# Altium PCB pcb.pcbdoc (part 3 of 3)
Units mm, origin at the board's own origin, x right, y up, seen from the top; angles counter-clockwise.
Board outline 95 x 60 mm, 4 copper layers (Top Layer, TopInt Layer, BotInt Layer, Bottom Layer), stack 1.456 mm thick; 194 components, 186 nets, 781 pads, 313 vias.
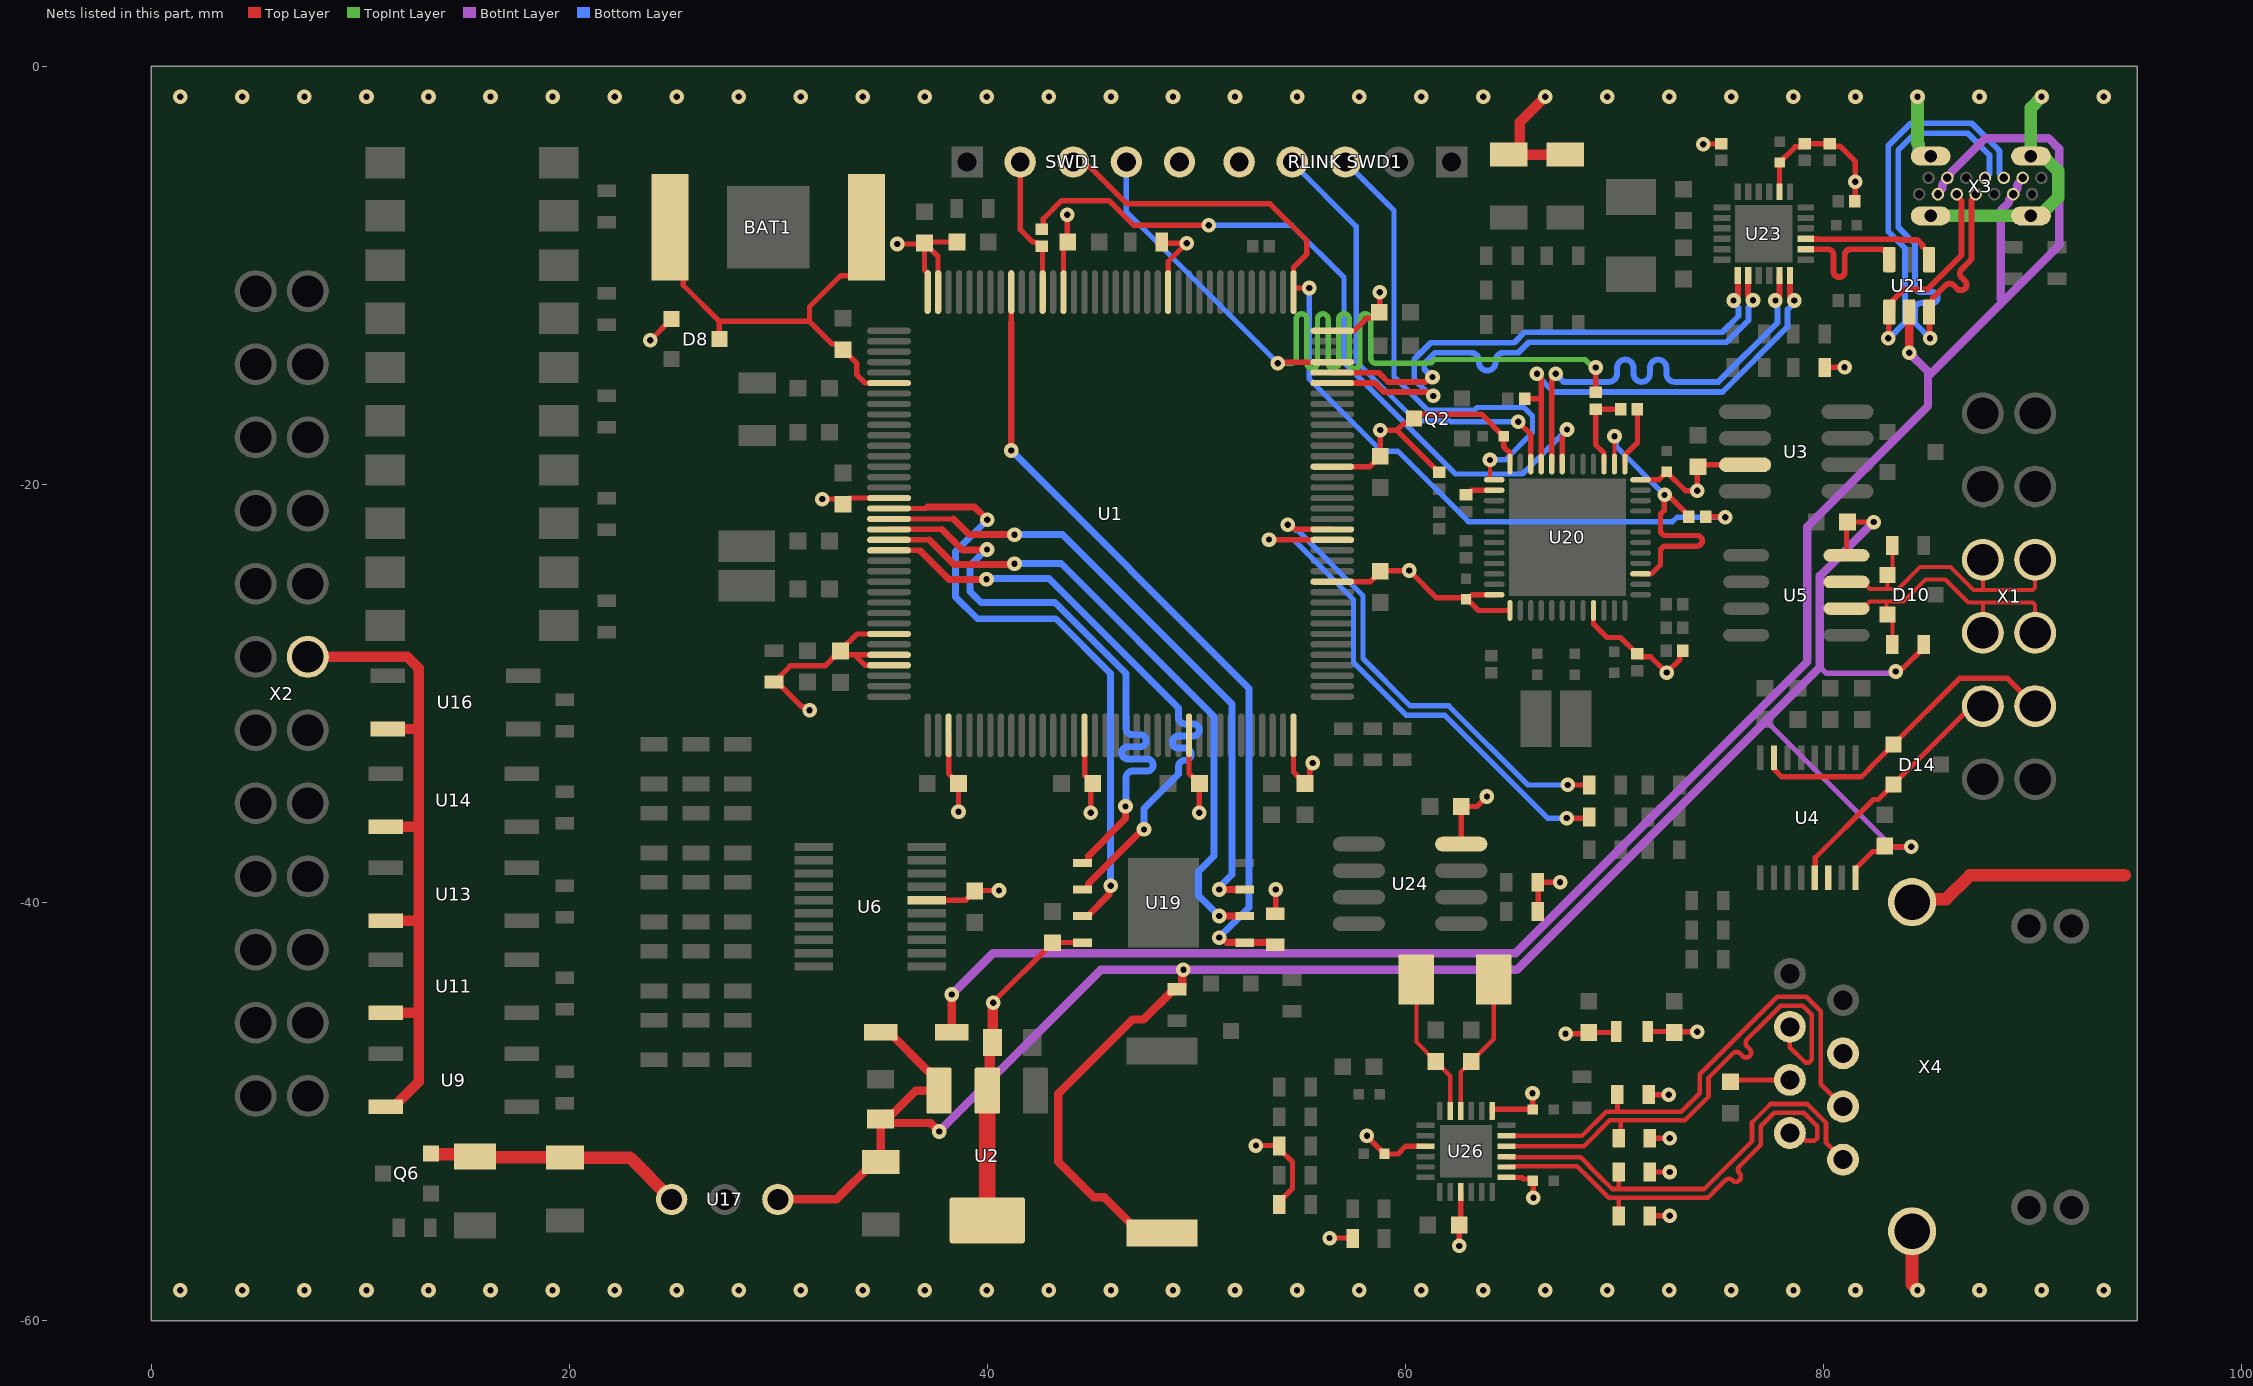
[diagram p5: the nets of this part, all layers, seen from the top]

## Via types
v1: diameter 0.7, hole 0.3, Top Layer to Bottom Layer, tented both sides, 313 vias

## Nets (pads, with @x,y where several pads share a name; then routed paths per layer and width w, separated by ;. In a path a pad name is that pad's centre, name@x,y a point inside that pad or via, vN(x,y) a via of type N, cw(c..) or ccw(c..) an arc to the next point about the centre after c; other vN are vias at no path point) (continued)
OUT_COM: U9.4 U11.4 U13.4 U14.4 U16.4 X2.18 | length 33.7
  Top Layer w0.5: X2.18@7.5,-28.25 12.26,-28.25 12.8,-28.79 12.8,-31.698 ; U9.4@11.225,-49.77 11.7,-49.77 11.8,-49.67 11.8,-49.565 12.8,-48.565 12.8,-45.2 ; U11.4@11.225,-45.27 12.73,-45.27 12.8,-45.2 ; U13.4@11.225,-40.87 12.73,-40.87 12.8,-40.8 ; U14.4@11.225,-36.37 12.77,-36.37 12.8,-36.4 ; U16.4@11.312,-31.698 12.8,-31.698 ; 12.8,-45.2 12.8,-40.8 ; 12.8,-40.8 12.8,-36.4 ; 12.8,-36.4 12.8,-31.698
QUADSPI_CLK: U1.22 U19.6 | length 30.6
  Top Layer w0.254: U1.22@35.3,-23.15 36.75,-23.15 36.784,-23.184
  Top Layer w0.325: 36.784,-23.184 36.809,-23.184 38.165,-24.54 39.96,-24.54 v1(39.963,-24.538) ; U19.6@44.549,-39.375 44.799,-39.375 44.837,-39.337 44.837,-39.087 47.424,-36.5 v1(47.5,-36.5)
  Bottom Layer w0.325: v1(39.963,-24.538) 40,-24.5 42.95,-24.5 49.141,-30.691 49.141,-30.967 49.141,-31.13 ccw(c49.466,-31.13) 49.466,-31.455 49.854,-31.455 cw(c49.854,-31.744) 50.144,-31.744 cw(c49.854,-31.744) 49.854,-32.034 49.141,-32.034 ccw(c49.141,-32.323) 48.852,-32.323 ccw(c49.141,-32.323) 49.141,-32.613 49.466,-32.613 cw(c49.466,-32.902) 49.756,-32.902 cw(c49.466,-32.902) 49.466,-33.192 ccw(c49.466,-33.517) 49.141,-33.517 49.141,-33.859 48.934,-34.066 47.5,-35.5 v1(47.5,-36.5)
QUADSPI_NCS: R31.2 U1.136 U19.1 | length 39
  Top Layer w0.254: 41.15,-12.3 U1.136@41.15,-10.8
  Top Layer w0.325: v1(41.15,-18.375) 41.15,-12.3 ; v1(51.094,-41.675) 51.215,-41.675 51.455,-41.915 U19.1@52.319,-41.915 53.662,-41.915 R31.2@53.774,-42.027
  Bottom Layer w0.325: v1(41.15,-18.375) 52.525,-29.75 52.525,-40.244 v1(51.094,-41.675)
QUADSPI_OI0: U1.20 U19.5 | length 30.3
  Top Layer w0.254: U1.20@35.3,-22.15 35.306,-22.144 37.819,-22.144 37.825,-22.15
  Top Layer w0.325: 37.825,-22.15 38.815,-23.14 39.96,-23.14 v1(39.988,-23.113) ; U19.5@44.799,-38.105 44.837,-38.067 44.837,-37.763 46.613,-35.987 v1(46.613,-35.4)
  Bottom Layer w0.325: v1(39.988,-23.113) 39.944,-23.113 39.175,-23.882 39.175,-25.118 39.698,-25.641 43.237,-25.641 46.633,-29.037 46.633,-30.368 46.633,-31.646 ccw(c46.958,-31.646) 46.958,-31.971 47.307,-31.971 cw(c47.307,-32.261) 47.596,-32.261 cw(c47.307,-32.261) 47.307,-32.55 46.714,-32.55 ccw(c46.714,-32.84) 46.425,-32.84 ccw(c46.714,-32.84) 46.714,-33.129 47.645,-33.129 cw(c47.645,-33.419) 47.934,-33.419 cw(c47.645,-33.419) 47.645,-33.708 46.958,-33.708 ccw(c46.958,-34.033) 46.633,-34.033 46.633,-34.775 46.633,-35.379 v1(46.613,-35.4)
QUADSPI_OI1: U1.21 U19.2 | length 30.6
  Top Layer w0.254: U1.21@35.3,-22.65 37.227,-22.652
  Top Layer w0.325: 37.227,-22.652 38.4,-23.825 41.263,-23.825 v1(41.3,-23.788) ; v1(51.094,-40.645) U19.2@52.319,-40.645
  Bottom Layer w0.325: v1(41.3,-23.788) 43.538,-23.788 50.85,-31.1 50.85,-37.775 50.109,-38.516 50.109,-39.66 v1(51.094,-40.645)
QUADSPI_OI2: U1.19 U19.3 | length 30.4
  Top Layer w0.254: U1.19@35.3,-21.65 38.375,-21.65
  Top Layer w0.325: 38.375,-21.65 39.125,-22.4 v1(41.3,-22.4) ; v1(51.094,-39.375) U19.3@52.319,-39.375
  Bottom Layer w0.325: v1(41.3,-22.4) 43.6,-22.4 51.7,-30.5 51.7,-38.668 51.094,-39.273 v1(51.094,-39.375)
QUADSPI_OI3: U1.18 U19.7 | length 30.6
  Top Layer w0.254: U1.18@35.3,-21.15 37.062,-21.15 37.137,-21.075
  Top Layer w0.325: 37.137,-21.075 39.387,-21.075 v1(40,-21.688) ; U19.7@44.549,-40.645 44.799,-40.645 44.837,-40.607 45.828,-39.616 45.828,-39.272 v1(45.9,-39.2)
  Bottom Layer w0.325: v1(40,-21.688) 38.475,-23.213 38.475,-25.375 39.525,-26.425 43.279,-26.425 45.9,-29.046 v1(45.9,-39.2)
RD_N: R49.1 U26.22 X4.6 | length 24.4
  Top Layer w0.22: U26.22@64.83,-51.65 68.544,-51.65 69.774,-50.42 70.3,-50.42 ; R49.1@70.198,-51.275 70.3,-51.172 70.3,-50.42 ; X4.6@78.395,-45.945 78.395,-46.915 79.131,-47.652 79.314,-47.652 79.443,-47.523 79.443,-45.369 79,-44.927 77.96,-44.927 77.088,-45.798 76.342,-46.545 ccw(c76.509,-46.713) 76.342,-46.88 76.469,-47.008 cw(c76.301,-47.175) 76.469,-47.343 cw(c76.301,-47.175) 76.134,-47.343 76.006,-47.216 ccw(c75.839,-47.383) 75.671,-47.216 75.258,-47.629 74.5,-48.386 74.5,-49.294 73.374,-50.42 70.3,-50.42
RD_P: R48.1 U26.23 X4.3 | length 24.4
  Top Layer w0.22: U26.23@64.83,-51.15 68.45,-51.15 69.6,-50 70.2,-50 ; R48.1@70.145,-49.187 70.145,-49.945 70.2,-50 ; X4.3@80.935,-49.755 79.863,-48.683 79.863,-45.195 79.174,-44.507 77.786,-44.507 74.08,-48.212 74.08,-49.12 73.2,-50 70.2,-50
RED_LED: R61.2 U1.89 | length 23.7
  Top Layer w0.254: v1(54.375,-21.925) 54.496,-21.925 54.721,-22.15 U1.89@56.5,-22.15 ; v1(67.77,-34.373) R61.2@68.895,-34.373
  Bottom Layer w0.254: v1(54.375,-21.925) 54.496,-21.925 54.754,-22.183 54.831,-22.183 57.973,-25.325 57.973,-28.33 60.235,-30.592 62.076,-30.592 65.857,-34.373 v1(67.77,-34.373)
RS485_N: D10.1 R5.1 U5.7 X1.3 X1.10 | length 15
  Top Layer w0.2: U5.7@81.1,-24.665 81.882,-24.665 82.217,-25 83.064,-25 ; R5.1@83.308,-22.95 83.308,-24.078 D10.1@83.064,-24.322 83.064,-25 ; X1.10@87.625,-23.6 87.625,-25.025 87.65,-25.05 ; X1.3@90.125,-23.6 90.125,-24.933 90.008,-25.05 87.65,-25.05 ; 83.064,-25 83.575,-25 84.625,-23.95 86.074,-23.95 87.174,-25.05 87.65,-25.05
RS485_P: D10.2 R6.2 U5.6 X1.4 X1.9 | length 15.1
  Top Layer w0.2: U5.6@81.1,-25.935 81.882,-25.935 82.217,-25.6 83.02,-25.6 ; R6.2@83.3,-27.65 83.3,-26.463 D10.2@83.064,-26.227 83.02,-26.184 83.02,-25.6 ; X1.9@87.625,-27.1 87.625,-25.7 87.675,-25.65 ; X1.4@90.125,-27.1 90.125,-25.767 90.008,-25.65 87.675,-25.65 ; 83.02,-25.6 83.824,-25.6 84.874,-24.55 85.825,-24.55 86.925,-25.65 87.675,-25.65
RTS1: U4.14
RX1: D14.2 U4.13 X1.8 | length 12
  Top Layer w0.254: U4.13@79.58,-38.814 79.605,-38.788 79.605,-37.855 82.39,-35.071 82.621,-35.071 D14.2@83.339,-34.352 86.757,-30.934 87.291,-30.934 X1.8@87.625,-30.6
SHIELD: C63.2 R79.2 X3.SH1 X3.SH2 X3.SH3 X3.SH4 X4.13 X4.14 | length 35.7
  Top Layer w0.5: v1(66.69,-1.45) 65.475,-2.665 65.475,-3.95 65.2,-4.225 C63.2@64.95,-4.225 67.05,-4.225 R79.2@67.65,-4.225
  Top Layer w0.6: X4.14@84.235,-55.725 84.235,-58.261 84.497,-58.523 v1(84.497,-58.55) ; X4.13@84.235,-39.975 84.375,-39.835 85.865,-39.835 87,-38.7 94.4,-38.7
  TopInt Layer w0.6: v1(84.497,-1.45) 84.497,-3.667 84.568,-3.738 84.568,-4.156 84.706,-4.295 X3.SH4@85.125,-4.295 ; X3.SH3@85.125,-7.155 X3.SH1@89.925,-7.155 90.344,-7.155 91.225,-6.274 91.225,-5.004 90.574,-4.352 89.982,-4.352 X3.SH2@89.925,-4.295 89.925,-1.984 90.432,-1.477 v1(90.432,-1.45)
  other v1: 1.4,-58.55 4.368,-58.55 7.335,-58.55 10.303,-58.55 13.271,-58.55 16.239,-58.55 19.206,-58.55 22.174,-58.55 25.142,-58.55 28.11,-58.55 31.077,-58.55 34.045,-58.55 37.013,-58.55 39.981,-58.55 42.948,-58.55 45.916,-58.55 48.884,-58.55 51.852,-58.55 54.819,-58.55 57.787,-58.55 60.755,-58.55 63.723,-58.55 66.69,-58.55 69.658,-58.55 72.626,-58.55 75.594,-58.55 78.561,-58.55 81.529,-58.55 87.464,-58.55 90.432,-58.55 93.4,-58.55 1.4,-1.45 4.368,-1.45 7.335,-1.45 10.303,-1.45 13.271,-1.45 16.239,-1.45 19.206,-1.45 22.174,-1.45 25.142,-1.45 28.11,-1.45 31.077,-1.45 34.045,-1.45 37.013,-1.45 39.981,-1.45 42.948,-1.45 45.916,-1.45 48.884,-1.45 51.852,-1.45 54.819,-1.45 57.787,-1.45 60.755,-1.45 63.723,-1.45 69.658,-1.45 72.626,-1.45 75.594,-1.45 78.561,-1.45 81.529,-1.45 87.464,-1.45 93.4,-1.45
SWCLK: "RLINK SWD1.3" U20.37 | length 23.2
  Top Layer w0.2: v1(64.05,-18.825) 64.05,-19.752 64.073,-19.775 U20.37@64.25,-19.775
  Bottom Layer w0.254: 57.13,-4.575 59.453,-6.898 59.453,-14.838 61.056,-16.44 63.31,-16.44 63.427,-16.323 65.68,-16.323 66.077,-16.72 66.077,-17.523 64.775,-18.825 v1(64.05,-18.825)
SWCLK1: R41.2 SWD1.3 U1.109 | length 44.3
  Top Layer w0.254: SWD1.3@44.115,-4.575 44.353,-4.813 44.913,-4.813 46.675,-6.575 53.532,-6.575 55.277,-8.32 55.277,-8.998 54.65,-9.625 U1.109@54.65,-10.621 ; U1.109@54.65,-10.8 U1.109@54.65,-10.621 ; v1(55.4,-10.6) 54.671,-10.6 U1.109@54.65,-10.621 ; R41.2@74.364,-21.536 74.379,-21.552 75.282,-21.552 v1(75.297,-21.567)
  Bottom Layer w0.254: v1(55.4,-10.6) 55.4,-14.957 58.852,-18.41 59.644,-18.41 63.011,-21.777 72.78,-21.777 72.991,-21.567 v1(75.297,-21.567)
SWDIO: "RLINK SWD1.4" U20.34 | length 22
  Top Layer w0.254: v1(65.4,-17) 65.4,-17.013 66,-17.613 U20.34@66,-19.025
  Bottom Layer w0.254: 54.59,-4.575 54.59,-4.598 57.647,-7.656 57.647,-14.105 60.496,-16.954 62.111,-16.954 62.157,-17 v1(65.4,-17)
SWDIO1: R42.2 SWD1.4 U1.105 | length 50.6
  Top Layer w0.254: v1(53.9,-14.2) 53.95,-14.15 U1.105@56.5,-14.15 ; R42.2@69.1,-15.6 v1(69.1,-14.404)
  TopInt Layer w0.254: v1(53.9,-14.2) 54.4,-14.2 54.527,-14.2 ccw(c54.527,-13.946) 54.781,-13.946 54.781,-12.089 cw(c55.035,-12.089) 55.289,-12.089 55.289,-14.199 ccw(c55.543,-14.199) 55.797,-14.199 55.797,-12.089 cw(c56.051,-12.089) 56.305,-12.089 56.305,-14.199 ccw(c56.559,-14.199) 56.813,-14.199 56.813,-12.089 cw(c57.067,-12.089) 57.321,-12.089 57.321,-14.199 ccw(c57.575,-14.199) 57.829,-14.199 57.829,-12.089 cw(c58.083,-12.089) 58.337,-12.089 58.337,-13.946 ccw(c58.591,-13.946) 58.591,-14.2 59.772,-14.2 61.006,-14.2 61.019,-14.187 61.234,-14.187 61.398,-14.023 68.599,-14.023 68.979,-14.404 v1(69.1,-14.404)
  Bottom Layer w0.254: SWD1.4@46.655,-4.575 46.655,-6.955 v1(53.9,-14.2)
SWO1: R43.2 SWD1.2 U1.133 | length 6.8
  Top Layer w0.254: SWD1.2@41.575,-4.575 41.575,-7.812 42.165,-8.402 42.278,-8.402 42.328,-8.452 42.452,-8.452 R43.2@42.6,-8.6 ; R43.2@42.641,-8.641 42.641,-10.791 U1.133@42.65,-10.8
T_JTCK: R41.1 U20.15 U20.26 | length 14.8
  Top Layer w0.2: U20.26@70,-19.025 v1(70,-17.7)
  Top Layer w0.254: U20.15@71.25,-24.275 71.252,-24.273 71.766,-24.273 72.2,-23.839 72.2,-23.204 cw(c72.454,-23.204) 72.454,-22.95 73.949,-22.95 ccw(c73.949,-22.696) 73.949,-22.442 72.454,-22.442 cw(c72.454,-22.188) 72.2,-22.188 72.2,-21.633 72.2,-21.421 72.39,-21.231 72.39,-20.706 72.496,-20.6 72.5,-20.6 v1(72.4,-20.5) ; v1@72.527,-20.5 72.527,-20.506 72.606,-20.585 72.638,-20.585 73.564,-21.511 R41.1@73.564,-21.536
  Bottom Layer w0.254: v1(70,-17.7) 70.085,-17.785 70.085,-18.185 v1(72.4,-20.5)
T_JTMS: R37.2 R42.1 U20.27 | length 4
  Top Layer w0.254: U20.27@69.5,-19.025 69.5,-18.5 69.1,-18.1 R42.1@69.1,-16.4 R37.2@70.3,-16.4
T_SWDIO_IN: R37.1 U20.25 | length 2.9
  Top Layer w0.254: U20.25@70.5,-19.025 70.51,-19.015 70.51,-18.59 71.1,-18 R37.1@71.1,-16.4
T_SWO: R43.1 U20.31 | length 36.4
  Top Layer w0.254: R43.1@42.6,-7.8 42.677,-7.723 42.677,-7.293 43.547,-6.423 45.823,-6.423 47,-7.6 v1(50.6,-7.6) ; U20.31@67.5,-19.025 67.5,-17.725 67.732,-17.493 v1(67.732,-17.372)
  Bottom Layer w0.254: v1(50.6,-7.6) 54.557,-7.6 57.067,-10.109 57.067,-14.167 62.402,-19.502 65.602,-19.502 v1(67.732,-17.372)
TD_N: R47.1 U26.20 X4.2 | length 21.5
  Top Layer w0.22: U26.20@64.83,-52.65 64.85,-52.63 65.19,-52.63 65.21,-52.61 68.21,-52.61 68.79,-53.19 69.72,-54.12 70.2,-54.12 ; R47.1@70.198,-54.987 70.2,-54.985 70.2,-54.12 ; X4.2@78.395,-51.025 78.748,-51.025 79.119,-51.397 79.571,-51.397 79.7,-51.268 79.7,-50.7 79.055,-50.055 77.639,-50.055 77,-50.694 77,-51.594 76.797,-51.797 75.981,-52.613 ccw(c76.148,-52.781) 75.981,-52.949 cw(c75.813,-53.116) 75.981,-53.284 cw(c75.813,-53.116) 75.645,-53.284 ccw(c75.478,-53.452) 75.31,-53.284 74.897,-53.697 74.474,-54.12 70.2,-54.12
TD_P: R46.1 U26.21 X4.1 | length 21.4
  Top Layer w0.22: U26.21@64.83,-52.15 64.85,-52.17 65.19,-52.17 65.21,-52.19 68.384,-52.19 69.21,-53.016 69.894,-53.7 70.2,-53.7 ; R46.1@70.198,-52.887 70.198,-53.698 70.2,-53.7 ; X4.1@80.935,-52.295 80.12,-51.48 80.12,-50.526 79.229,-49.635 77.465,-49.635 76.58,-50.52 76.58,-51.42 74.3,-53.7 70.2,-53.7
TX1: D14.1 U4.7 X1.5 | length 15.7
  Top Layer w0.254: U4.7@77.63,-33.072 77.655,-33.097 77.655,-33.643 77.992,-33.98 81.818,-33.98 82.215,-33.583 82.215,-33.572 D14.1@83.339,-32.447 86.513,-29.273 88.798,-29.273 X1.5@90.125,-30.6
USB_CONN_D_N: U21.4 X3.A7 X3.B7 | length 26.7
  Top Layer w0.279: v1(83.1,-13) 83.125,-12.975 U21.4@83.125,-11.755 ; U21.4@83.15,-11.755 83.305,-11.6 83.305,-11.212 83.856,-10.662 84.267,-10.662 84.274,-10.669 84.963,-10.669 86.6,-9.032 86.6,-6.427 86.375,-6.202 X3.A7@86.375,-6.115
  Bottom Layer w0.279: v1(83.1,-13) 83.147,-13 83.9,-12.247 83.9,-8.7 83.1,-7.9 83.1,-3.8 84.179,-2.721 87.099,-2.721 88.415,-4.037 88.415,-5.125 X3.B7@88.625,-5.335
USB_CONN_D_P: U21.6 X3.A6 X3.B6 | length 26.5
  Top Layer w0.279: v1@85.075,-12.975 85.075,-11.78 U21.6@85.05,-11.755 85.205,-11.6 85.205,-11.105 85.359,-10.951 85.835,-10.475 cw(c86.033,-10.673) 86.23,-10.475 86.386,-10.631 ccw(c86.575,-10.443) 86.763,-10.631 ccw(c86.575,-10.443) 86.763,-10.254 86.607,-10.098 cw(c86.805,-9.9) 86.607,-9.703 86.955,-9.355 87.079,-9.231 87.079,-6.397 87.275,-6.202 X3.A6@87.275,-6.115
  Bottom Layer w0.279: v1(85.1,-13) 84.379,-12.279 84.379,-11.606 cw(c84.659,-11.606) 84.659,-11.327 85.202,-11.327 ccw(c85.202,-11.06) 85.468,-11.06 ccw(c85.202,-11.06) 85.202,-10.793 84.659,-10.793 cw(c84.659,-10.514) 84.379,-10.514 84.379,-8.859 84.379,-8.501 83.579,-7.701 83.579,-3.999 84.378,-3.2 86.9,-3.2 87.935,-4.235 87.935,-5.125 X3.B6@87.725,-5.335
USB_HUB_N: U21.3 U23.14 | length 6.6
  Top Layer w0.279: U23.14@79.15,-8.75 79.529,-8.75 80.202,-8.75 cw(c80.202,-9.029) 80.481,-9.029 80.481,-9.818 ccw(c80.748,-9.818) 80.748,-10.085 ccw(c80.748,-9.818) 81.015,-9.818 81.015,-9.029 cw(c81.294,-9.029) 81.294,-8.75 82.761,-8.75 82.831,-8.75 82.861,-8.78 82.995,-8.78 83.15,-8.935 U21.3@83.15,-9.245
USB_HUB_P: U21.1 U23.15 | length 6.5
  Top Layer w0.279: U23.15@79.15,-8.25 79.16,-8.26 79.431,-8.26 79.691,-8.26 79.701,-8.271 83.674,-8.271 83.703,-8.3 84.493,-8.3 84.735,-8.542 84.735,-8.62 85.05,-8.935 U21.1@85.05,-9.245
USB_MCU_N: U1.103 U23.7 | length 25.8
  Top Layer w0.279: U1.103@56.5,-15.15 56.504,-15.146 57.418,-15.146 57.425,-15.14 58.53,-15.14 58.972,-15.582 61.041,-15.582 61.223,-15.763 v1(61.337,-15.763) ; v1(75.7,-11.2) 75.91,-10.99 75.91,-10.541 75.91,-10.01 U23.7@75.9,-10
  Bottom Layer w0.279: v1(61.337,-15.763) 61.223,-15.763 61.013,-15.554 60.421,-14.962 60.421,-14.015 61.215,-13.221 65.201,-13.221 65.701,-12.721 75.159,-12.721 75.935,-11.945 75.935,-11.548 75.7,-11.314 v1(75.7,-11.2)
USB_MCU_P: U1.104 U23.8 | length 25.7
  Top Layer w0.279: U1.104@56.5,-14.65 57.406,-14.65 57.416,-14.66 58.728,-14.66 59.17,-15.102 60.947,-15.102 61.185,-14.864 v1(61.299,-14.864) ; U23.8@76.4,-10 76.39,-10.01 76.39,-10.99 76.585,-11.185 v1(76.626,-11.185)
  Bottom Layer w0.279: v1(61.299,-14.864) 61.274,-14.864 60.9,-14.49 60.9,-14.214 61.414,-13.7 62.2,-13.7 63.127,-13.7 cw(c63.127,-14.094) 63.521,-14.094 63.521,-14.163 ccw(c63.915,-14.163) 63.915,-14.557 ccw(c63.915,-14.163) 64.308,-14.163 64.308,-14.094 cw(c64.702,-14.094) 64.702,-13.7 65.4,-13.7 65.9,-13.2 75.357,-13.2 76.414,-12.143 76.414,-11.511 76.626,-11.299 v1(76.626,-11.185)
USB_RENUM: R29.1 U20.38 | length 1.4
  Top Layer w0.254: R29.1@62.9,-20.5 62.925,-20.5 63.15,-20.275 U20.38@64.25,-20.275
USB_RLINK_N: U20.32 U23.11 | length 21.6
  Top Layer w0.279: U20.32@67,-19.025 67,-14.893 v1(67.193,-14.7) ; v1(77.7,-11.2) 77.9,-11 U23.11@77.9,-10
  Bottom Layer w0.279: v1(67.193,-14.7) 67.193,-14.72 67.567,-15.094 67.8,-15.094 69.728,-15.094 ccw(c69.728,-14.7) 70.121,-14.7 70.121,-14.423 cw(c70.515,-14.423) 70.515,-14.029 cw(c70.515,-14.423) 70.909,-14.423 70.909,-14.7 ccw(c71.303,-14.7) 71.303,-15.094 ccw(c71.303,-14.7) 71.696,-14.7 71.696,-14.423 cw(c72.09,-14.423) 72.09,-14.029 cw(c72.09,-14.423) 72.484,-14.423 72.484,-14.7 ccw(c72.877,-14.7) 72.877,-15.094 73.805,-15.094 74.966,-15.094 77.797,-12.263 77.797,-11.574 77.78,-11.557 77.78,-11.28 v1(77.7,-11.2)
USB_RLINK_P: R36.1 U20.33 U23.12 | length 21.6
  Top Layer w0.279: R36.1@65.7,-15.9 66.5,-15.9 ; v1(66.293,-14.7) 66.5,-14.907 66.5,-15.9 ; U20.33@66.5,-19.025 66.5,-15.9 ; U23.12@78.4,-10 78.4,-11 v1(78.6,-11.2)
  Bottom Layer w0.279: v1(66.293,-14.7) 66.293,-14.775 67.09,-15.573 75.165,-15.573 78.276,-12.461 78.276,-11.637 78.6,-11.314 v1(78.6,-11.2)
VBAT: BAT1.P1 C7.2 D8.3 U1.6 | length 21.9
  Top Layer w0.254: BAT1.P1@24.825,-7.7 25.458,-8.333 25.458,-10.472 27.186,-12.2 ; D8.3@27.186,-13.047 27.186,-12.2 ; BAT1.P1@34.225,-7.7 34.225,-9.256 33.462,-10.019 32.981,-10.019 31.5,-11.5 31.5,-12.2 ; U1.6@35.3,-15.15 34.149,-15.15 33.761,-14.762 33.761,-14.211 32.827,-13.277 32.577,-13.277 31.5,-12.2 ; 27.186,-12.2 31.5,-12.2
VCC3.3V: "RLINK SWD1.5" C3.1 C11.2 C12.2 C13.2 C14.2 C15.2 C16.2 C17.2 C18.2 C19.2 C20.2 C21.2 C30.2 C36.2 C38.2 C40.2 C41.2 C42.2 C46.2 C47.1 C52.2 C54.2 C56.2 C62.2 D8.1 D11.1 L2.2 Q2.3 R1.2 R28.2 R31.1 R34.2 R40.2 R51.1 R53.2 R64.2 R65.2 R66.2 R67.2 R71.1 R76.2 R77.2 R78.2 SWD1.5 U1.17 U1.30 U1.32 U1.33 U1.39 U1.52 U1.62 U1.72 U1.84 U1.95 U1.108 U1.121 U1.131 U1.143 U1.144 U2.1 U2.4 U3.3 U6.16 U19.8 U20.1 U20.9 U20.24 U20.36 U20.48 U23.20 U24.8 U26.9 U26.15 | length 141.6
  Top Layer w0.254: v1(23.875,-13.1) 23.895,-13.1 D8.1@24.9,-12.095 ; v1(31.5,-30.8) 31.379,-30.8 31.216,-30.637 31.137,-30.637 30.115,-29.615 29.635,-29.615 R1.2@29.8,-29.45 30.073,-29.177 30.573,-28.677 32.233,-28.677 C15.2@32.96,-27.95 ; v1(32.1,-20.7) 32.85,-20.7 C16.2@33.1,-20.95 33.4,-20.65 U1.17@35.3,-20.65 ; U1.33@35.3,-28.65 35.299,-28.649 34.159,-28.649 33.66,-28.15 ; U1.32@35.3,-28.15 33.66,-28.15 ; U1.30@35.3,-27.15 33.76,-27.15 C15.2@32.96,-27.95 ; v1(35.7,-8.5) 36.95,-8.5 C12.2@37,-8.45 ; U6.16@37.1,-39.882 38.968,-39.882 C30.2@39.4,-39.45 39.425,-39.425 v1(40.56,-39.425) ; U1.144@37.15,-10.8 37.15,-9.888 37,-9.738 C12.2@37,-8.45 ; U1.143@37.65,-10.8 37.641,-10.791 37.641,-9.091 C12.2@37,-8.45 ; U1.39@38.15,-32 38.15,-33.827 C17.2@38.623,-34.3 v1(38.623,-35.65) ; C3.1@38.55,-8.4 37.05,-8.4 C12.2@37,-8.45 ; v1(40.286,-44.786) 40.286,-44.758 C40.2@43.117,-41.927 43.13,-41.915 U19.8@44.549,-41.915 ; U1.131@43.65,-10.8 43.65,-8.6 C11.2@43.827,-8.423 ; C11.2@43.827,-8.45 C11.2@43.827,-8.423 ; v1(43.827,-7.1) C11.2@43.827,-8.423 ; C11.2@43.85,-8.4 C11.2@43.827,-8.423 ; U1.52@44.65,-32 44.659,-32.009 44.659,-33.909 C20.2@45.05,-34.3 ; v1(44.946,-35.7) 44.946,-34.531 C20.2@45.127,-34.35 ; R78.2@48.35,-8.4 48.406,-8.456 v1(49.541,-8.456) 48.65,-9.347 U1.121@48.65,-10.8 ; U1.62@49.65,-32 49.65,-33.827 50.173,-34.35 50.137,-34.385 v1(50.137,-35.7) ; v1(52.85,-51.625) R71.1@53.96,-51.625 ; R31.1@53.774,-40.527 53.8,-40.502 v1(53.8,-39.375) ; R51.1@53.975,-54.45 53.975,-54.3 54.604,-53.671 54.604,-52.419 53.96,-51.775 R71.1@53.96,-51.625 ; R71.1@53.977,-51.642 R71.1@53.96,-51.625 ; U1.72@54.65,-32 54.65,-33.752 C54.2@55.2,-34.302 55.425,-34.077 55.425,-33.595 55.575,-33.446 v1(55.575,-33.325) ; v1(56.375,-56.05) 57.465,-56.05 R53.2@57.477,-56.063 ; U1.84@56.5,-24.65 58.327,-24.65 58.85,-24.127 58.852,-24.129 60.171,-24.129 v1(60.185,-24.115) ; U1.95@56.5,-19.15 58.3,-19.15 C18.2@58.8,-18.65 v1(58.8,-17.4) 59.575,-17.4 ; U1.108@56.5,-12.65 56.509,-12.641 57.559,-12.641 58.159,-12.041 58.477,-12.041 C14.2@58.75,-11.768 58.776,-11.742 v1(58.776,-10.8) ; v1(58.16,-51.153) 58.16,-51.185 C47.1@59,-52.025 59.641,-52.025 60.016,-51.65 U26.9@60.96,-51.65 ; v1@60.2,-24.127 61.495,-25.422 62.847,-25.422 62.925,-25.5 C42.2@62.9,-25.5 ; R28.2@61.625,-19.425 61.6,-19.425 59.575,-17.4 ; v1(62.575,-56.425) 62.575,-55.43 C52.2@62.57,-55.425 62.645,-55.35 U26.15@62.645,-53.835 ; U24.8@62.675,-37.201 C56.2@62.675,-35.406 63.419,-35.406 v1(63.9,-34.925) ; U20.48@64.25,-25.275 63.2,-25.275 62.975,-25.5 62.975,-25.575 63.023,-25.623 63.098,-25.623 63.5,-26.025 U20.1@65,-26.025 ; U20.36@65,-19.025 65,-18.5 64.7,-18.2 C41.2@64.7,-17.7 63.638,-16.638 60.414,-16.638 Q2.3@60.414,-16.847 60.16,-17.101 59.898,-17.101 59.6,-17.4 59.575,-17.4 ; R76.2@66.325,-40.425 66.35,-40.4 66.35,-39.025 v1(67.4,-39.025) ; v1(67.665,-46.275) 68.707,-46.275 C62.2@68.767,-46.215 70.042,-46.215 L2.2@70.092,-46.165 ; U20.9@69,-26.025 69.002,-26.027 69.002,-26.683 69.636,-27.318 70.293,-27.318 71.075,-28.1 R40.2@71.1,-28.1 71.248,-28.248 71.736,-28.248 72.488,-29 v1(72.5,-29) 73.127,-28.373 73.127,-28.098 R34.2@73.275,-27.95 ; U20.24@71.25,-19.775 72.125,-19.775 C36.2@72.5,-19.4 73.4,-20.3 v1(73.956,-20.3) 73.956,-19.261 C21.2@73.922,-19.228 ; C21.2@74,-19.15 74.09,-19.06 U3.3@76.25,-19.06 ; v1(74.25,-3.725) 74.262,-3.712 75.088,-3.712 R64.2@75.1,-3.7 ; U23.20@77.9,-6 C46.2@77.9,-4.6 78.652,-3.848 78.927,-3.848 79.075,-3.7 R65.2@79.1,-3.7 R66.2@80.3,-3.7 80.415,-3.815 80.79,-3.815 81.525,-4.55 v1(81.525,-5.525) 81.512,-5.538 81.512,-6.438 R67.2@81.5,-6.45 ; D11.1@80.135,-14.475 80.21,-14.4 v1(81.01,-14.4) ; C15.2@32.96,-27.95 33.16,-28.15 33.66,-28.15
  Top Layer w0.5: U2.1@40,-49 40.125,-48.875 40.125,-46.825 C38.2@40.25,-46.7 40.268,-46.682 40.268,-44.805 v1(40.286,-44.786)
  Top Layer w0.8: U2.4@40,-55.2 U2.1@40,-49
VCC3.3VA: C49.2 C59.1 C60.1 C61.2 L2.1 R46.2 R47.2 R48.2 R49.2 U26.1 U26.19 X4.4 X4.5 | length 14
  Top Layer w0.254: U26.1@64.145,-49.965 64.145,-49.895 64.148,-49.892 66.092,-49.892 C59.1@66.1,-49.9 v1@66.1,-49.133 ; U26.19@64.83,-53.15 65.578,-53.15 65.649,-53.221 66.021,-53.221 C60.1@66.1,-53.3 ; C60.1@66.112,-53.312 66.112,-54.113 v1(66.125,-54.125) ; L2.1@71.592,-46.165 72.817,-46.165 C61.2@72.867,-46.215 72.907,-46.175 v1(73.965,-46.175) ; R48.2@71.645,-49.187 v1(72.595,-49.187) ; R47.2@71.698,-54.987 v1(72.648,-54.987) ; R46.2@71.698,-52.887 v1(72.648,-52.887) ; R49.2@71.698,-51.275 v1(72.648,-51.275) ; C49.2@75.55,-48.575 75.64,-48.485 X4.4@78.395,-48.485
  other v1: 66.082,-49.115
VCC5V: BUZ1.1 C24.2 C27.2 C35.2 C37.2 D6.2 R3.2 R6.1 U2.2 U4.16 U5.8 U17.3 | length 117.5
  Top Layer w0.254: U5.8@81.1,-23.395 81.1,-21.85 C27.2@81.15,-21.8 v1(82.4,-21.8) ; U4.16@81.53,-38.814 81.555,-38.788 81.555,-38.36 82.356,-37.559 82.663,-37.559 C24.2@82.925,-37.298 82.953,-37.326 v1(84.195,-37.326) ; v1(83.458,-28.95) 83.543,-28.865 83.735,-28.865 84.8,-27.8 R6.1@84.8,-27.65
  Top Layer w0.4: U17.3@29.98,-54.2 32.775,-54.2 34.575,-52.4 C35.2@34.9,-52.4 C37.2@34.9,-50.35 ; D6.2@34.9,-46.2 35.3,-46.2 37.2,-48.1 37.3,-48.1 37.7,-48.5 U2.2@37.7,-49 36.584,-49 35.484,-50.1 35.15,-50.1 C37.2@34.9,-50.35 ; v1(37.7,-50.95) 37.292,-50.542 35.092,-50.542 C37.2@34.9,-50.35 ; BUZ1.1@48.35,-55.8 47.3,-55.8 45.601,-54.101 45.101,-54.101 43.4,-52.4 43.4,-49.134 46.943,-45.592 47.483,-45.592 48.825,-44.25 48.975,-44.25 R3.2@49.075,-44.15 ; R3.2@49.282,-44.05 49.325,-44.05 49.325,-43.272 v1(49.382,-43.215)
  BotInt Layer w0.254: 77.245,-31.304 83.267,-37.326 v1(84.195,-37.326) ; 79.825,-28.724 80.126,-29.025 v1@83.45,-29.025
  BotInt Layer w0.4: v1(37.7,-50.95) 45.435,-43.215 v1(49.382,-43.215) 65.334,-43.215 77.245,-31.304 79.825,-28.724 79.825,-24.375 v1(82.4,-21.8)
VCC5VUSB: D6.1 U21.5 X3.A4 X3.A9 X3.B4 X3.B9 | length 96.1
  Top Layer w0.4: D6.1@38.3,-46.2 v1(38.3,-44.4) ; v1(84.1,-13.7) U21.5@84.1,-11.755
  BotInt Layer w0.4: v1(38.3,-44.4) 40.275,-42.425 65.275,-42.425 79.225,-28.475 79.225,-22.014 85,-16.239 85,-14.841 ; v1(84.1,-13.7) 85,-14.6 85,-14.841 ; X3.A9@85.475,-6.115 85.475,-6.061 85.675,-5.861 85.675,-5.675 85.725,-5.625 85.725,-5.589 85.925,-5.389 X3.B4@85.925,-5.335 85.925,-5.281 86.125,-5.081 86.125,-5.045 87.725,-3.445 90.777,-3.445 91.275,-3.943 91.275,-8.566 88.716,-11.125 ; X3.B9@89.525,-5.335 89.525,-5.389 89.325,-5.589 89.325,-5.625 89.275,-5.675 89.275,-5.861 89.075,-6.061 X3.A4@89.075,-6.115 89.075,-6.169 88.875,-6.369 88.875,-6.503 88.475,-6.903 88.475,-11.125 88.716,-11.125 ; 85,-14.841 88.716,-11.125
VCC24V: C34.1 D4.2 Q6.2 U17.1 | length 12.4
  Top Layer w0.6: Q6.2@13.384,-52.002 13.415,-52.033 15.384,-52.033 D4.2@15.5,-52.149 15.525,-52.174 19.774,-52.174 C34.1@19.8,-52.2 22.9,-52.2 U17.1@24.9,-54.2
XTAL1: C48.1 U26.5 Y5.1 | length 7
  Top Layer w0.2: Y5.1@60.525,-43.675 60.525,-46.675 C48.1@61.45,-47.6 61.45,-47.675 61.525,-47.675 62.145,-48.295 U26.5@62.145,-49.965
XTAL2: C53.1 U26.4 Y5.2 | length 7
  Top Layer w0.2: U26.4@62.645,-49.965 62.645,-48.105 63.075,-47.675 63.15,-47.675 C53.1@63.15,-47.6 64.225,-46.525 Y5.2@64.225,-43.675
YELLOW_LED: R33.2 U1.88 | length 25.7
  Top Layer w0.254: v1(53.475,-22.637) 53.481,-22.644 56.494,-22.644 U1.88@56.5,-22.65 ; v1(67.72,-35.96) R33.2@68.845,-35.96
  Bottom Layer w0.254: v1(53.475,-22.637) 54.643,-22.637 57.519,-25.513 57.519,-28.518 60.047,-31.046 61.888,-31.046 66.802,-35.96 v1@67.707,-35.96
pads on no net: "RLINK SWD1.2" D8.2 U1.1 U1.2 U1.5 U1.7 U1.15 U1.26 U1.28 U1.29 U1.34 U1.37 U1.40 U1.41 U1.42 U1.56 U1.57 U1.58 U1.59 U1.60 U1.63 U1.64 U1.65 U1.66 U1.67 U1.68 U1.69 U1.75 U1.76 U1.79 U1.82 U1.85 U1.86 U1.90 U1.91 U1.92 U1.98 U1.99 U1.100 U1.101 U1.102 U1.110 U1.111 U1.112 U1.116 U1.117 U1.118 U1.119 U1.122 U1.123 U1.124 U1.126 U1.128 U1.129 U1.132 U1.134 U1.137 U1.141 U1.142 U3.5 U3.8 U6.8 U6.9 U6.10 U6.11 U6.12 U6.13 U20.3 U20.4 U20.11 U20.14 U20.16 U20.17 U20.18 U20.19 U20.21 U20.22 U20.28 U20.29 U20.39 U20.40 U20.41 U20.42 U20.43 U20.45 U20.46 U23.2 U23.5 U23.6 U23.9 U23.10 U23.19 U23.23 U23.24 X4.7

## Polygon pours and split planes (outlines as drawn)
VCC3.3V on BotInt Layer "TopInt Layer-GND" (solid, remove dead copper, pour order 15): 88.5,-54.2 ccw(c90.2,-54.2) 90.2,-55.9 93.052,-55.9 93.052,-39.725 90.433,-39.725 ccw(c90.433,-41.658) 88.5,-41.658 83.775,-41.658 cw(c83.775,-40.012) 83.775,-38.366 84.434,-38.366 ccw(c84.434,-36.9) 85.9,-36.9 cw(c86.9,-36.9) 86.9,-35.9 91.975,-35.9 91.975,-9.4 91.975,-8 83.775,-8 83.775,-3.3 16.55,-3.3 16.55,-26.35 ccw(c20.4,-26.35) 20.4,-30.2 28.917,-30.2 cw(c28.917,-31.848) 30.083,-30.683 34.805,-35.405 cw(c32.894,-37.321) 35.6,-37.324 35.6,-43.61 cw(c32.048,-43.612) 34.329,-46.334 30.367,-49.657 cw(c26.006,-44.458) 26.005,-51.244 10.244,-51.244 cw(c10.243,-50.2) 9.2,-50.2 9.2,-48.799 ccw(c8.102,-48.798) 8.101,-47.7 4,-47.7 ccw(c3.999,-48.549) 3.15,-48.55 3.15,-56.8 82.125,-56.8 82.125,-54.2
VCC3.3VA on BotInt Layer "VCC3.3VA_L03_P003" (solid, remove dead copper, pour order 3): 64.35,-53.35 64.35,-49.74 cw(c66.59,-49.74) 66.59,-47.5 70,-47.5 ccw(c70,-46.675) 70.825,-46.675 70.825,-45.275 cw(c72.2,-45.275) 72.2,-43.9 78.9,-43.9 cw(c78.9,-47.125) 82.125,-47.125 82.125,-56.8 67.2,-56.8 67.2,-55.3 66.3,-55.3 cw(c66.3,-53.35)
IN_COM on BotInt Layer "IN_COM_L03_P009" (solid, pour order 9): 2.8,-28.5 2.8,-45.4 ccw(c4.4,-45.4) 4.4,-47 20.034,-47 cw(c20.035,-49.33) 21.683,-47.683 ccw(c23.656,-45.71) 23.656,-48.5 27.743,-48.5 ccw(c27.743,-46.193) 29.263,-47.929 31.778,-45.727 ccw(c29.611,-43.252) 32.9,-43.252 32.9,-36.5 ccw(c31.726,-36.5) 32.557,-35.67 28.76,-31.863 ccw(c27.901,-32.699) 27.9,-31.5 11.7,-31.5 cw(c11.7,-29.6) 9.8,-29.6 9.8,-28.624 ccw(c7.476,-28.624) 7.476,-26.3 5,-26.3 ccw(c5,-28.5)
no net on Top Solder "TopInt Layer-SHIELD" (solid): 95,-2.8 95,0 0,0 0,-2.8
no net on Top Solder "TopInt Layer-SHIELD" (solid): 95,-60 95,-57.2 0,-57.2 0,-60
SHIELD on Bottom Solder "TopInt Layer-SHIELD" (solid, pour order 16): 95,-2.8 95,0 0,0 0,-2.8
no net on Bottom Solder "TopInt Layer-SHIELD" (solid): 95,-60 95,-57.2 0,-57.2 0,-60
SHIELD on Bottom Layer "TopInt Layer-SHIELD" (solid, pour order 18): 0,-60 95,-60 95,0 0,0 0,-2.8 93.7,-2.8 93.7,-57.2 0,-57.2
SHIELD on Top Layer "TopInt Layer-SHIELD" (solid, pour order 13): 0,-60 95,-60 95,0 0,0 0,-2.8 93.7,-2.8 93.7,-57.2 0,-57.2
GND on TopInt Layer "TopInt Layer-GND" (solid, remove dead copper, pour order 5): 88.5,-54.2 ccw(c90.2,-54.2) 90.2,-55.9 93.052,-55.9 93.052,-39.725 90.433,-39.725 ccw(c90.433,-41.658) 88.5,-41.658 83.775,-41.658 cw(c83.775,-40.012) 83.775,-38.366 84.434,-38.366 ccw(c84.434,-36.9) 85.9,-36.9 cw(c86.9,-36.9) 86.9,-35.9 91.975,-35.9 91.975,-9.4 91.975,-8 83.775,-8 83.775,-3.3 16.55,-3.3 16.55,-49.77 ccw(c17.23,-49.77) 17.23,-50.45 21.225,-50.45 ccw(c21.225,-49.45) 22.225,-49.45 22.225,-31.327 cw(c22.627,-31.327) 22.627,-30.925 29.074,-30.925 cw(c29.076,-33.941) 31.21,-31.81 34.805,-35.405 cw(c32.893,-37.321) 35.6,-37.324 35.6,-43.61 cw(c32.048,-43.612) 34.329,-46.334 30.367,-49.657 cw(c26.006,-44.458) 26.005,-51.244 10.244,-51.244 cw(c10.244,-50.2) 9.2,-50.2 9.2,-48.799 ccw(c8.102,-48.798) 8.101,-47.7 4,-47.7 ccw(c3.999,-48.549) 3.15,-48.55 3.15,-56.8 82.125,-56.8 82.125,-54.2

## Other copper
BotInt Layer:
  pour cut-out: 16.362,-39.587 ccw(c17.712,-39.587) 17.712,-40.937 ccw(c17.712,-39.587) 19.062,-39.587 ccw(c17.712,-39.587) 17.712,-38.237 ccw(c17.712,-39.587)
  pour cut-out: 16.35,-44 ccw(c17.7,-44) 17.7,-45.35 ccw(c17.7,-44) 19.05,-44 ccw(c17.7,-44) 17.7,-42.65 ccw(c17.7,-44)
  pour cut-out: 16.35,-35.1 ccw(c17.7,-35.1) 17.7,-36.45 ccw(c17.7,-35.1) 19.05,-35.1 ccw(c17.7,-35.1) 17.7,-33.75 ccw(c17.7,-35.1)
TopInt Layer:
  pour cut-out: 33.3,-23.151 33.3,-22.3 ccw(c32.9,-22.3) 32.9,-21.9 30.65,-21.9 29.459,-20.709 ccw(c28.955,-21.213) 28.955,-20.5 27.6,-20.5 ccw(c27.6,-21.2) 26.9,-21.2 26.9,-26.2 ccw(c27.8,-26.2) 27.8,-27.1 29.059,-27.1 ccw(c29.059,-26.396) 29.557,-26.894 30.238,-26.212 cw(c30.99,-26.964) 30.99,-25.9 33.1,-25.9 ccw(c33.1,-25.7) 33.3,-25.7 33.3,-24.55 cw(c33.5,-24.55) 33.5,-24.35 cw(c33.501,-24.549) 33.7,-24.55 33.7,-25.8 cw(c33.2,-25.8) 33.2,-26.3 31.233,-26.3 ccw(c31.232,-27.343) 30.495,-26.606 29.857,-27.243 cw(c29.237,-26.624) 29.237,-27.5 27.7,-27.5 cw(c27.7,-26.225) 26.425,-26.225 26.425,-21.275 cw(c27.6,-21.275) 27.6,-20.1 29.264,-20.1 cw(c29.264,-20.89) 29.833,-20.341 31,-21.55 33.05,-21.55 cw(c33.052,-22.198) 33.7,-22.2 33.7,-23.15 cw(c33.501,-23.151) 33.5,-23.35 cw(c33.499,-23.151)
  pour cut-out: 33.2,-15.75 33.2,-14.8 ccw(c32.9,-14.8) 32.9,-14.5 31.441,-14.5 cw(c31.441,-13.193) 30.517,-14.117 29.786,-13.386 ccw(c29.338,-13.834) 29.337,-13.2 28.3,-13.2 ccw(c28.3,-13.5) 28,-13.5 28,-19.4 ccw(c28.3,-19.4) 28.3,-19.7 29.359,-19.7 ccw(c29.359,-18.997) 29.856,-19.494 30.31,-19.04 cw(c31.7,-20.431) 31.679,-18.465 33,-18.45 ccw(c33,-18.25) 33.2,-18.25 33.2,-17.15 cw(c33.4,-17.15) 33.4,-16.95 cw(c33.401,-17.149) 33.6,-17.15 33.6,-18.45 cw(c33.201,-18.451) 33.2,-18.85 31.751,-18.85 ccw(c31.751,-20.059) 30.895,-19.205 30.412,-19.688 cw(c29.417,-18.693) 29.417,-20.1 27.6,-20.1 27.6,-13.2 cw(c28,-13.2) 28,-12.8 29.375,-12.8 cw(c29.375,-14.067) 30.271,-13.171 30.99,-13.89 ccw(c31.618,-13.262) 31.618,-14.15 33.2,-14.15 cw(c33.201,-14.549) 33.6,-14.55 33.6,-15.75 cw(c33.401,-15.751) 33.4,-15.95 cw(c33.4,-15.75)
  pour cut-out: 62.988,-48.563 65.112,-46.438 ccw(c64.778,-46.104) 65.25,-46.104 65.25,-42.475 ccw(c65.075,-42.475) 65.075,-42.3 59.675,-42.3 ccw(c59.675,-42.4) 59.575,-42.4 59.575,-46.419 ccw(c60.012,-46.419) 59.703,-46.728 61.513,-48.538 cw(c61.406,-48.644) 61.3,-48.75 59.281,-46.731 cw(c59.597,-46.415) 59.15,-46.415 59.15,-42.3 cw(c59.575,-42.3) 59.575,-41.875 65.25,-41.875 cw(c65.25,-42.275) 65.65,-42.275 65.65,-46.119 cw(c65.213,-46.119) 65.522,-46.428 63.188,-48.762 cw(c63.087,-48.663)
  pour cut-out: 66.483,-27.531 65.983,-27.531 ccw(c65.983,-27.731) 65.783,-27.731 65.783,-28.169 cw(c64.425,-28.169) 65.385,-29.129 64.51,-30.005 ccw(c65.298,-30.793) 64.183,-30.794 64.183,-32.031 ccw(c64.883,-32.031) 64.883,-32.731 69.283,-32.731 ccw(c69.283,-31.731) 70.283,-31.731 70.283,-30.753 ccw(c69.024,-30.753) 69.914,-29.863 68.904,-28.852 cw(c69.195,-28.561) 68.783,-28.561 68.783,-27.881 ccw(c68.433,-27.881) 68.433,-27.531 67.983,-27.531 cw(c67.983,-27.331) 67.983,-27.131 68.783,-27.131 cw(c68.783,-27.531) 69.183,-27.531 69.183,-28.319 ccw(c69.936,-28.319) 69.404,-28.852 70.05,-29.499 cw(c68.522,-31.026) 70.683,-31.026 70.683,-31.831 cw(c69.383,-31.831) 69.383,-33.131 64.783,-33.131 cw(c64.783,-32.131) 63.783,-32.131 63.783,-30.552 cw(c64.557,-30.552) 64.01,-30.005 64.863,-29.151 ccw(c63.609,-27.897) 65.383,-27.896 65.383,-27.381 cw(c65.633,-27.381) 65.633,-27.131 66.483,-27.131 cw(c66.445,-27.331)
  pour cut-out: 73.941,-7.35 73.941,-3.941 ccw(c73.7,-3.941) 73.7,-3.7 69.7,-3.7 ccw(c69.7,-3.9) 69.5,-3.9 69.5,-11.7 ccw(c69.7,-11.7) 69.7,-11.9 73.7,-11.9 ccw(c73.7,-11.659) 73.941,-11.659 73.941,-8.75 cw(c74.141,-8.75) 74.141,-8.55 cw(c74.141,-8.75) 74.341,-8.75 74.341,-11.859 cw(c73.9,-11.859) 73.9,-12.3 69.5,-12.3 cw(c69.5,-11.9) 69.1,-11.9 69.1,-3.7 cw(c69.5,-3.7) 69.5,-3.3 73.9,-3.3 cw(c73.9,-3.741) 74.341,-3.741 74.341,-7.35 cw(c74.141,-7.35) 74.141,-7.55 cw(c74.141,-7.35)
Bottom Layer:
  text "robotics" at 30.2,-6.78 h2
  text "hardware" at 30.2,-8.38 h2
  text "solutions" at 30.2,-9.98 h2

## Silkscreen, mask and mechanical layers (free items; w line width, h text height)
Bottom Overlay:
  drawing of 62 lines, arcs and shapes, not listed
  text "USB-C" at 93.546,-4.079 h1.52 r90
  text "sdio" at 47.09,-6.805 h1 r90
  text "gnd" at 62.488,-6.809 h1 r90
  text "gnd" at 39.348,-6.855 h1 r90
  text "swclk" at 44.565,-6.855 h1 r90
  text "sdio" at 55.03,-6.859 h1 r90
  text "3.3V" at 49.69,-6.88 h1 r90
  text "3.3V" at 52.505,-6.884 h1 r90
  text "swo" at 59.963,-6.884 h1 r90
  text "swo" at 41.948,-6.93 h1 r90
  text "swclk" at 57.58,-6.934 h1 r90
  text "41" at 14.6,-11 h0.7
  text "40" at 17.2,-11 h0.7
  text "BareMetal PLC XL" at 34.448,-11.836 h1
  text "P/N: RHB.BP.00001" at 34.48,-13.536 h1
  text "31" at 14.6,-14.5 h0.7
  text "30" at 17.2,-14.5 h0.7
  text "HW  2.1.0" at 34.448,-15.536 h1
  text "CH" at 85.526,-16.905 h0.7
  text "CH" at 83.012,-16.93 h0.7
  text "21" at 14.6,-18 h0.7
  text "20" at 17.1,-18 h0.7
  text "CL" at 85.551,-20.345 h0.7
  text "CL" at 83.037,-20.37 h0.7
  text "t" at 24.525,-20.95 h6
  text "11" at 14.5,-21.5 h0.7
  text "10" at 17.1,-21.5 h0.7
  text "p" at 29.45,-21.6 h7
  text "RB" at 85.526,-23.89 h0.7
  text "RB" at 83.012,-23.916 h0.7
  text "01" at 14.6,-25 h0.7
  text "00" at 17.1,-25 h0.7
  text "RA" at 85.526,-27.38 h0.7
  text "RA" at 83.012,-27.406 h0.7
  text "OC" at 17.176,-28.48 h0.7
  text "IC" at 14.636,-28.505 h0.7
  text "TX" at 85.526,-30.87 h0.7
  text "RX" at 83.012,-30.896 h0.7
  text "O4" at 17.176,-31.883 h0.7
  text "I4" at 14.662,-31.909 h0.7
  text "GND" at 85.61,-34.271 h0.5
  text "GND" at 83.111,-34.284 h0.5
  text "I3" at 14.636,-35.49 h0.7
  text "O3" at 17.151,-35.49 h0.7
  text "O2" at 17.151,-38.868 h0.7
  text "I2" at 14.611,-38.894 h0.7
  text "O1" at 17.018,-42.418 h0.7
  text "Ethernet" at 93.696,-42.454 h1.52 r90
  text "I1" at 14.503,-42.469 h0.7
  text "O0" at 17.176,-45.879 h0.7
  text "I0" at 14.636,-45.904 h0.7
  text "VCC" at 14.729,-49.371 h0.5
  text "GND" at 17.269,-49.363 h0.5
  text "12-24V" at 17.3,-51.9 h0.7
Bottom Solder:
  text "robotics" at 30.2,-6.78 h2
  text "hardware" at 30.2,-8.38 h2
  text "solutions" at 30.2,-9.98 h2
Board:
  the board outline again, w0.15
TopAssy:
  lines w0.15: 0,-56 95,-56 ; 0,-4 95,-4